# Altium PCB Sh_VL53L7CXV0GC.PcbDoc
Units mm, origin at the board's own origin, x right, y up, seen from the top; angles counter-clockwise.
Board outline 37.5 x 30 mm, 2 copper layers (Top Layer, Bottom Layer); 10 components, 8 nets, 40 pads, 0 vias.
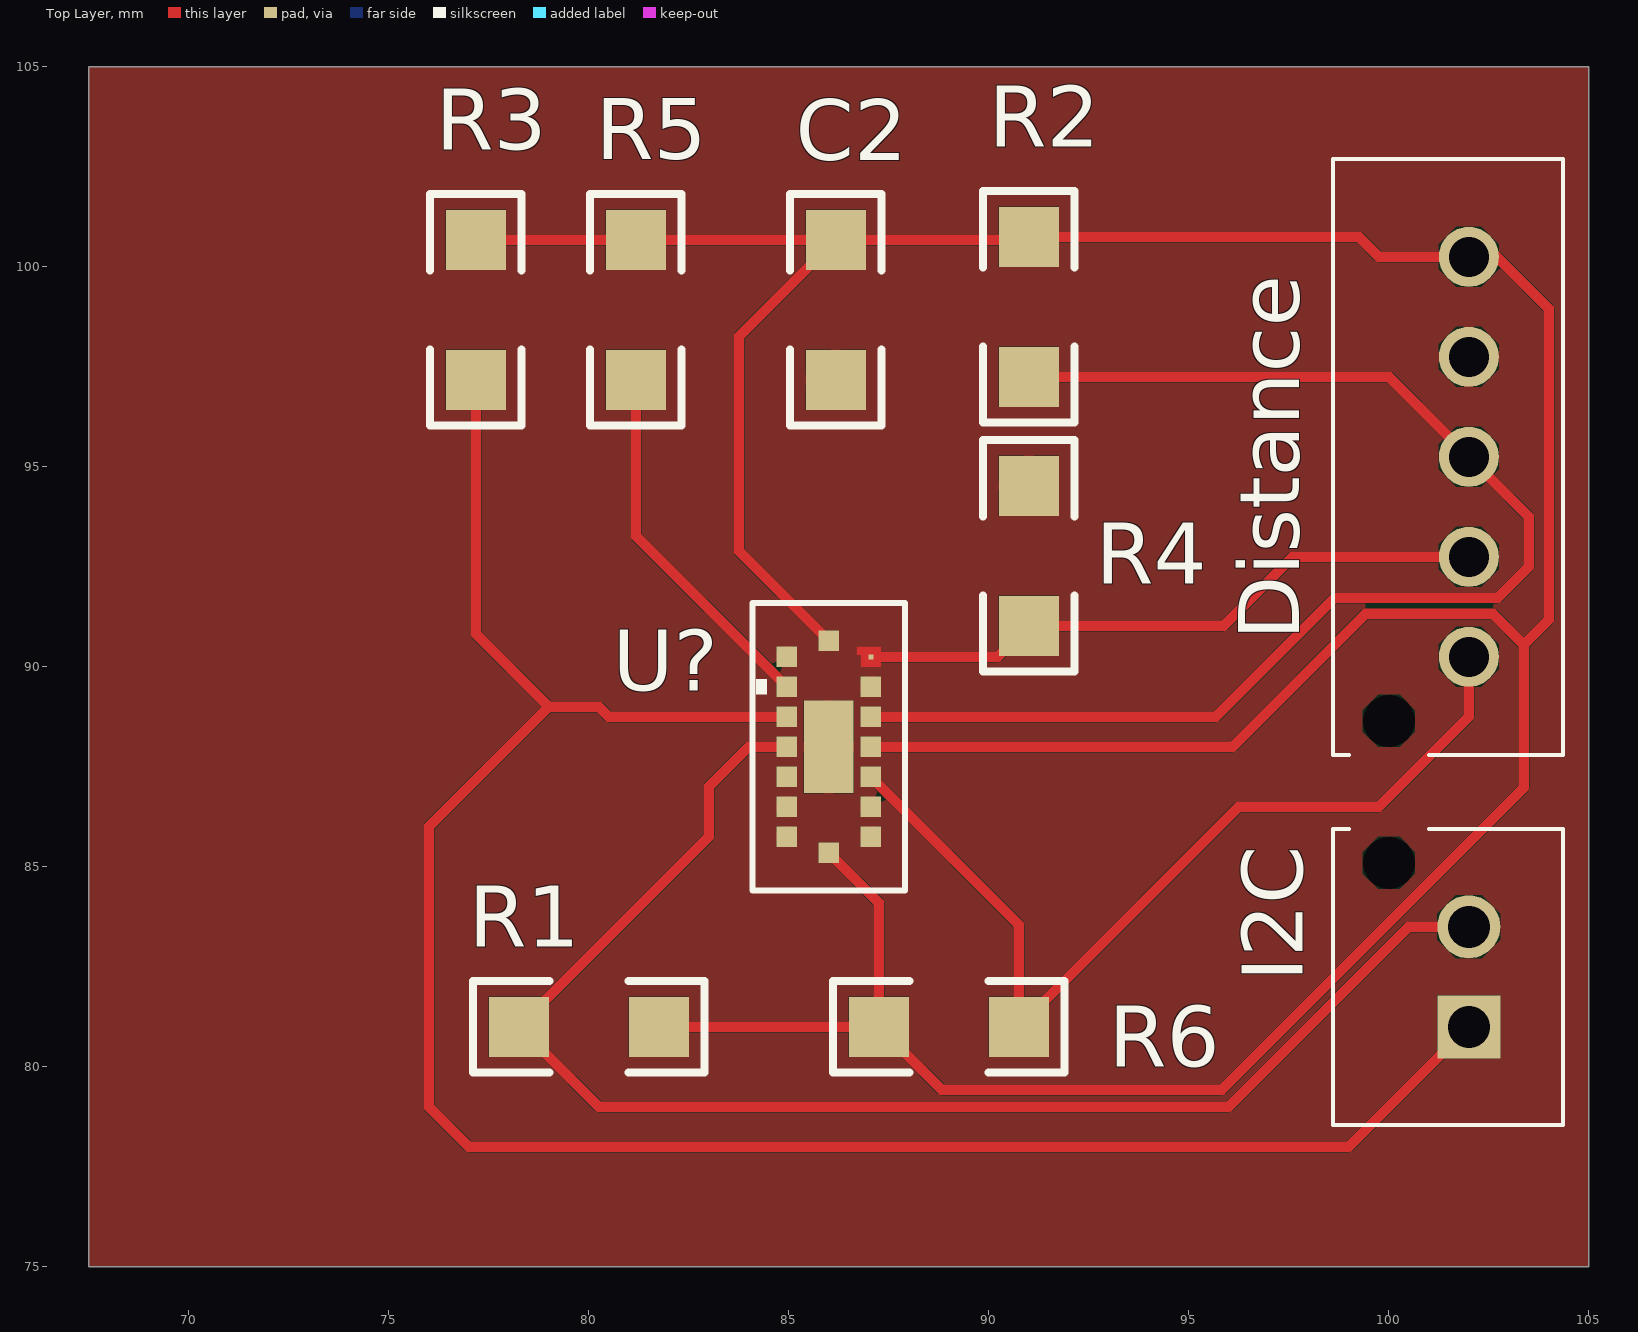
[diagram p0: Top Layer view]
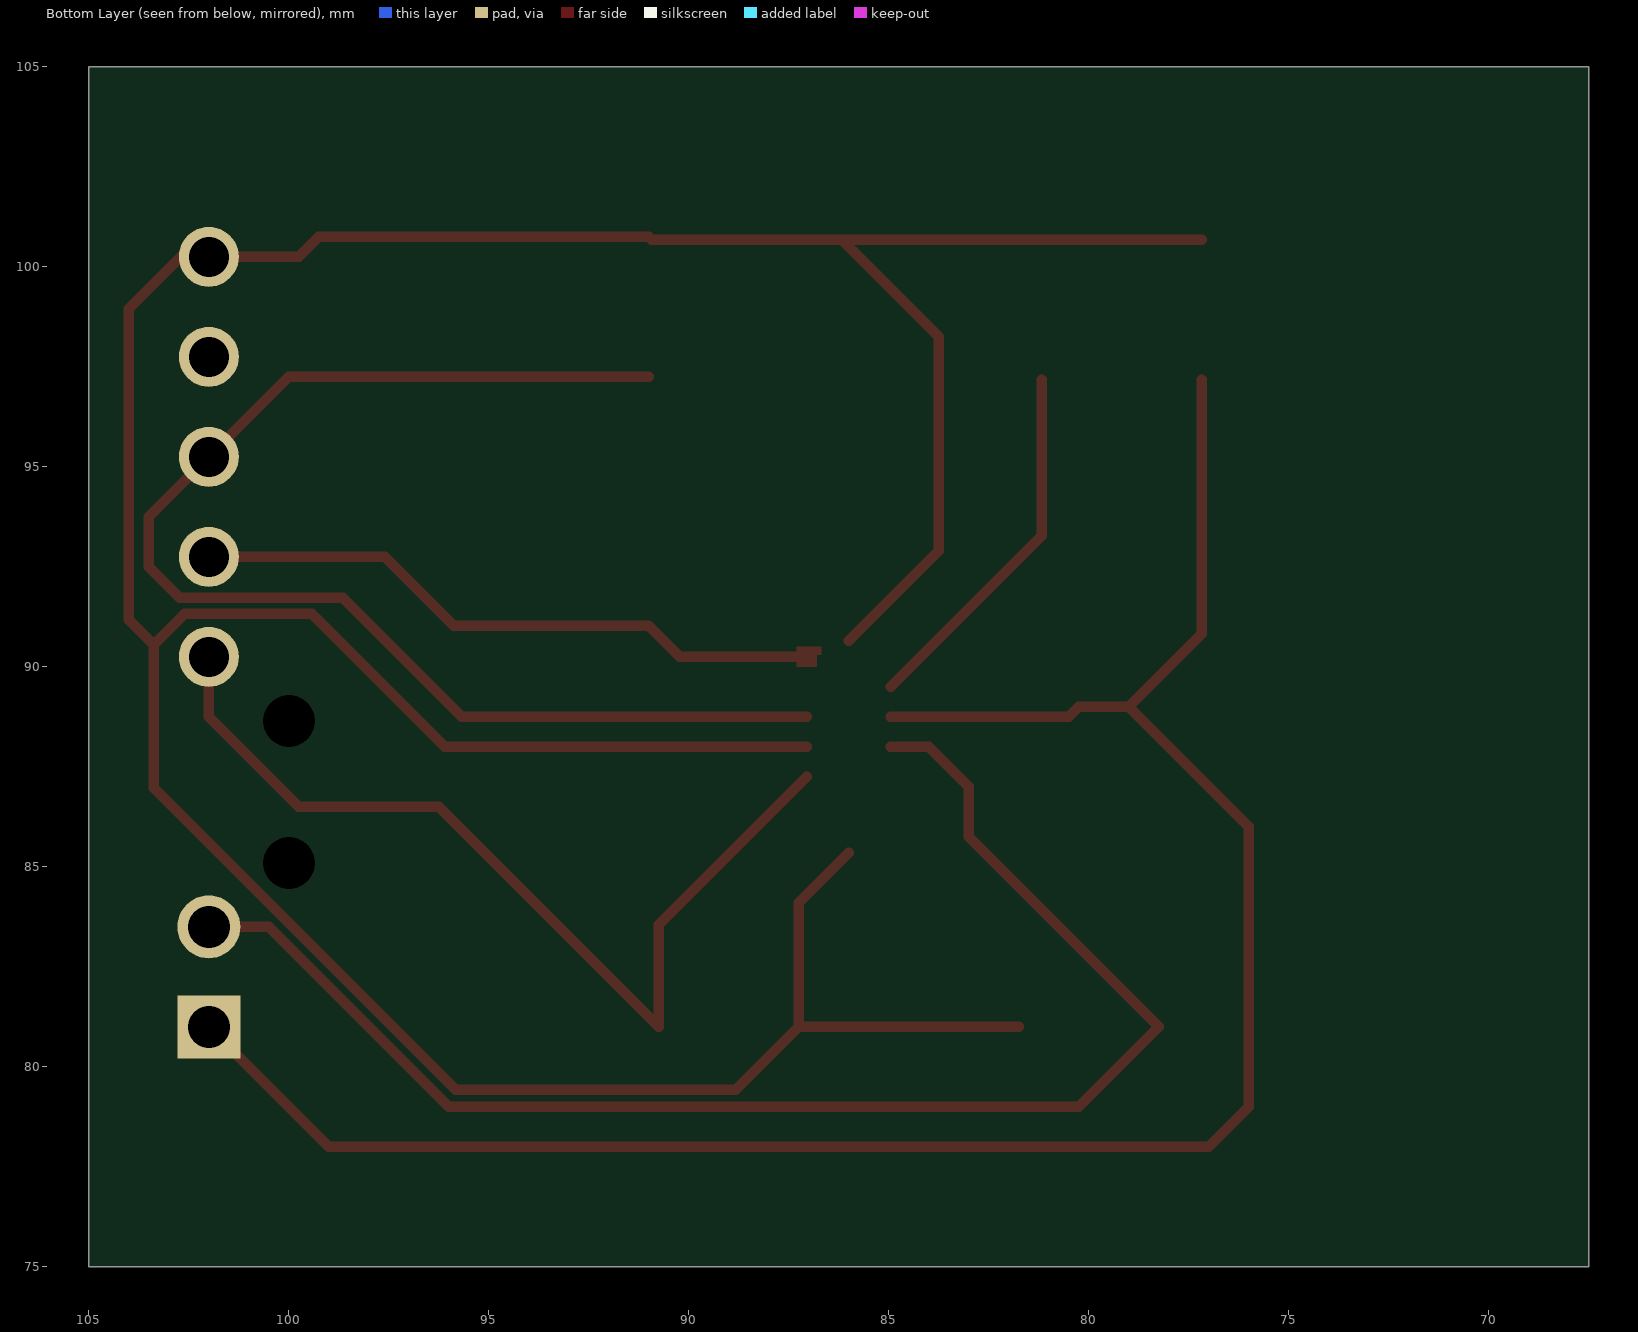
[diagram p1: Bottom Layer view, seen from below]
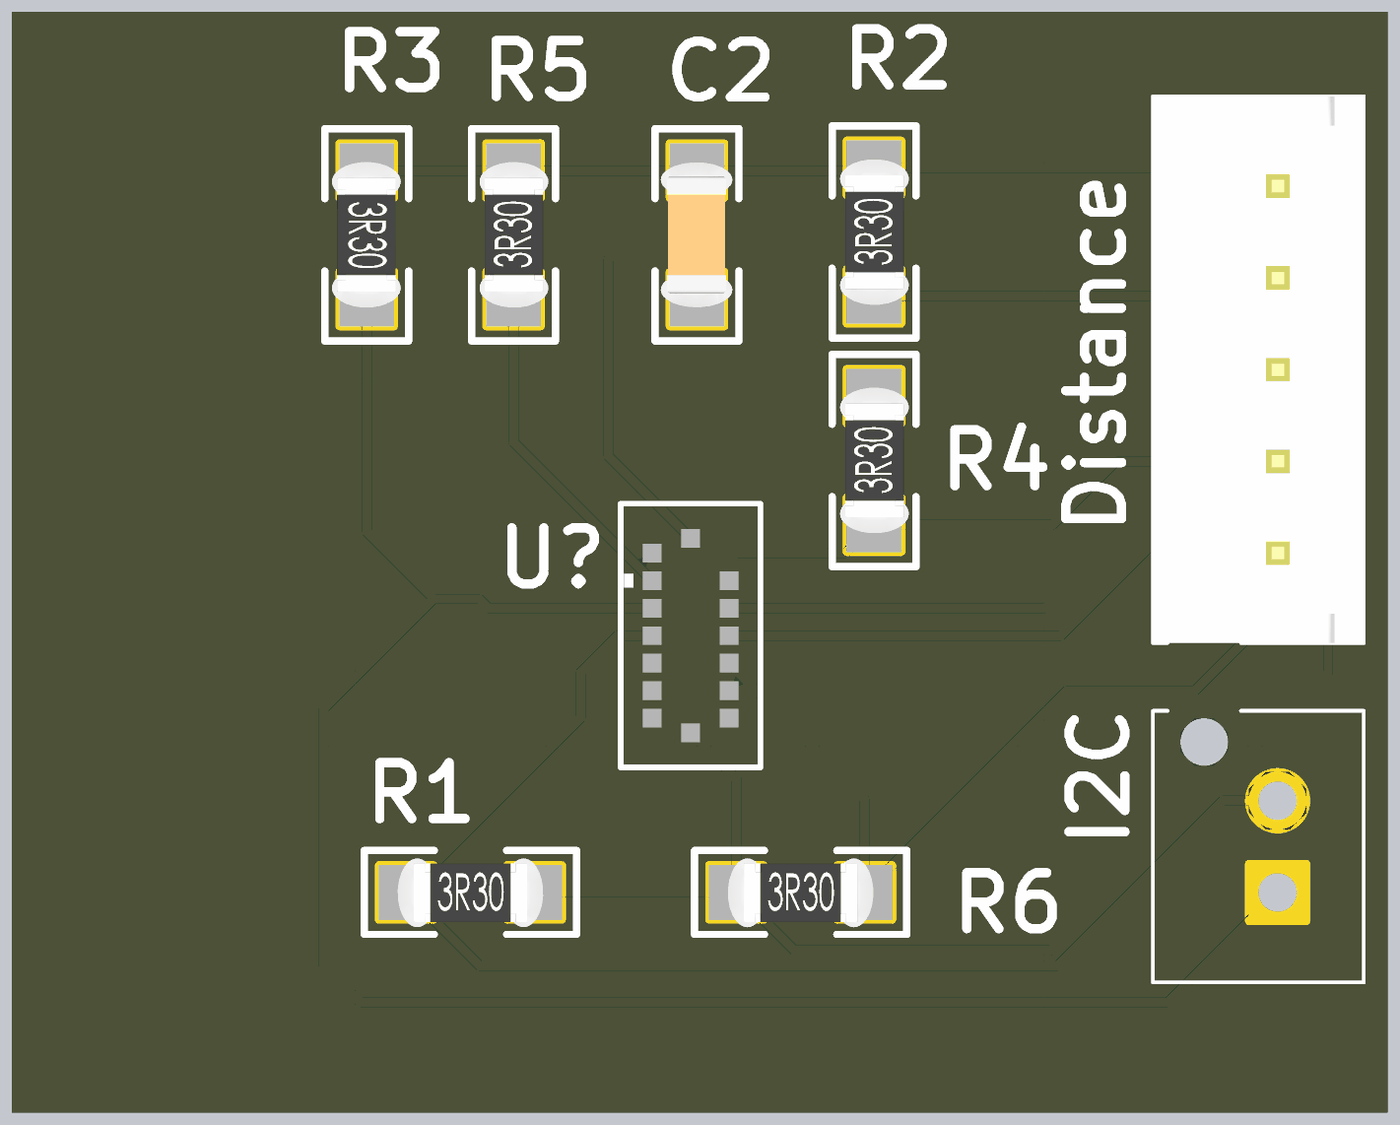
[diagram p2: 3D render of the assembled board from above, using the file's embedded part models]

## Layer stack, top to bottom
Top Solder: solder mask 0.0102, Solder Resist, Dk 3.5
Top Layer: signal copper 0.0356
Dielectric 1: dielectric 0.32, FR-4, Dk 4.8
Bottom Layer: signal copper 0.0356
Bottom Solder: solder mask 0.0102, Solder Resist, Dk 3.5

## Board outline
67.5,105 105,105 105,75 67.5,75

## Design rules (kind name [scope] priority, off if disabled: settings)
AssemblyTestPointUsage [All] p1 off:
AssemblyTestpoint [All] p1 off: testpointundercomponent=TRUE minsize=1.016 maxsize=2.54 preferedsize=1.524 minholesize=0 maxholesize=1.016 preferedholesize=0.813 testpointgrid=0.025 usegrid=TRUE gridtolerance=0 allowsidetop=TRUE allowsidebottom=TRUE
Clearance [All] p1 off: gap=0.254 ignorepadtopadclearanceinfootprint=FALSE
ComponentClearance [All] p1 off: gap=0.254 collisioncheckmode=3 verticalgap=0.254 showdistances=FALSE
DiffPairsRouting [All] p1 off: maxlimit=0.254 minlimit=0.254 mostfreqgap=0.254 toplayer_minwidth=0.381 toplayer_maxwidth=0.381 toplayer_prefwidth=0.381 bottomlayer_minwidth=0.381 bottomlayer_maxwidth=0.381 bottomlayer_prefwidth=0.381 maxuncoupledlength=12.7
FabricationTestPointUsage [All] p1 off: valid=0 allowmultiple=FALSE
FabricationTestpoint [All] p1 off: side=3 testpointundercomponent=TRUE minsize=1.016 maxsize=2.54 preferedsize=1.524 minholesize=0 maxholesize=1.016 preferedholesize=0.813 testpointgrid=0.025 allowsidetop=TRUE allowsidebottom=TRUE usegrid=TRUE gridtolerance=0
FanoutControl Fanout_BGA [IsBGA] p1 off: bgadir=Out bgaviamode=Centered fanoutstyle=Auto fanoutdirection=Alternating viagrid=0.025 // Fanout_BGA (Default Rule)
FanoutControl Fanout_LCC [IsLCC] p2 off: bgadir=Out bgaviamode=Centered fanoutstyle=Auto fanoutdirection=Alternating viagrid=0.025 // Fanout_LCC (Default Rule)
FanoutControl Fanout_SOIC [IsSOIC] p3 off: bgadir=Out bgaviamode=Centered fanoutstyle=Auto fanoutdirection=Alternating viagrid=0.025 // Fanout_SOIC (Default Rule)
FanoutControl Fanout_Small [(CompPinCount < 5)] p4 off: bgadir=Out bgaviamode=Centered fanoutstyle=Auto fanoutdirection=OutThenIn viagrid=0.025 // Fanout_Small (Default Rule)
FanoutControl Fanout_Default [All] p5 off: bgadir=Out bgaviamode=Centered fanoutstyle=Auto fanoutdirection=Alternating viagrid=0.025 // Fanout_Default (Default Rule)
Height [All] p1 off: minheight=0 maxheight=25.4 prefheight=12.7
HoleSize [All] p1 off: absolutevalues=TRUE maxlimit=2.54 minlimit=0.025 maxpercent=80.000 minpercent=20.000
HoleToHoleClearance [All] p1 off: gap=0.254 allowstackedmicrovias=TRUE
LayerPairs [All] p1 off: enforce=TRUE
MinimumSolderMaskSliver [All] p1 off: minsoldermaskwidth=0.254
NetAntennae [All] p1 off: netantennaetolerance=0
PasteMaskExpansion [All] p1 off: expansion=0
PlaneClearance [All] p1 off: clearance=0.508
PlaneConnect [All] p1 off: planeconnectstyle=Relief reliefexpansion=0.508 reliefentries=4 reliefconductorwidth=0.254 reliefairgap=0.254
PolygonConnect [All] p1 off: connectstyle=Relief reliefconductorwidth=0.254 reliefentries=4 polygonreliefangle="90 Angle" airgapwidth=0.254
RoutingCorners [All] p1 off: cornerstyle=45-Degree minsetback=2.54 maxsetback=2.54
RoutingLayers [All] p1 off: top layer_v5=TRUE bottom layer_v5=TRUE
RoutingPriority [All] p1 off: routingpriority=0
RoutingTopology [All] p1 off: topology=Shortest
RoutingVias [All] p1 off: holewidth=0.711 width=1.27 viastyle="Through Hole" minholewidth=0.711 minwidth=1.27 maxholewidth=0.711 maxwidth=1.27
ShortCircuit [All] p1 off: allowed=FALSE
SilkToSilkClearance [All] p1 off: silktosilkclearance=0.254
SilkToSolderMaskClearance [IsPad] p1 off: minsilkscreentomaskgap=0.254 clearancetoexposedcopper=TRUE
SolderMaskExpansion [All] p1 off: expansion=0.102 istentingtop=FALSE
UnRoutedNet [All] p1 off:
UnpouredPolygon [All] p1 off:
Width [All] p1 off: maxlimit=0.254 minlimit=0.254 preferedwidth=0.254
1 further rules are at their usual default settings.

## Components (designator, comment, footprint, x,y, rotation, side; value= is the part's Value field where it differs from the comment)
C2 "Cap" "Capacitor 1206" 86.175,98.925 r270 top
Distance "Header 5" B5BXHAMLFSN 102,90.25 r90 top
I2C "" B2BXHAMLFSN 102,81 r90 top
R1 "Res2" "Resistor 1206" 80,81 r0 top
R2 "Res2" "Resistor 1206" 91,99 r90 top
R3 "Res2" "Resistor 1206" 77.175,98.925 r270 top
R4 "Res2" "Resistor 1206" 91,92.775 r90 top
R5 "Res2" "Resistor 1206" 81.175,98.925 r90 top
R6 "Res2" "Resistor 1206" 89,81 r0 top
U? "VL53L7CXV0GC1" LGA16_OPTICAL-LINER_STM 86,88 r180 top

## Footprints (in the part's own frame and the unit in brackets; to place one, negate y for a bottom-side part, rotate by r counter-clockwise, add the part's x,y. Pads: shape width x height; smd on the part's side, far side on the other; paste and mask are expansions set on the pad)
B2BXHAMLFSN [mm]
  rect 1.575x1.575 hole 1.05: 1(0,0)
  round 1.575 hole 1.05: 2(2.5,0)
  round 0.65 hole 1.3 unplated: MH1(4.1,2)
  silkscreen extent -2.45,-2.35 4.95,3.4
B5BXHAMLFSN [mm]
  round 1.5 hole 1: 1(0,0) 2(2.5,0) 3(5,0) 4(7.5,0) 5(10,0)
  round 0.65 hole 1.3 unplated: MH1(-1.6,2)
  silkscreen extent -2.45,-2.35 12.45,3.4, body extent -2.45,-2.36 12.45,3.39, height 6.92
"Capacitor 1206" [mm]
  rect 1.5x1.5 smd: 1(-1.75,0) 2(1.75,0)
  silkscreen extent -2.89,-1.14 2.89,1.14, body extent -1.98,-0.99 1.98,0.96, height 1.3
LGA16_OPTICAL-LINER_STM [mil]
  rect 5x5 smd paste-2.5 mask-2.5: A1(-41.34,-88.58)
  rect 20x20 smd paste+0 mask+0: A2(-41.34,-59.06) A3(-41.34,-29.53) A4(-41.34,0) A5(-41.34,29.53) A6(-41.34,59.06) A7(-41.34,88.58) B1(0,-104.33) B7(0,104.33) C1(41.34,-88.58) C2(41.34,-59.06) C3(41.34,-29.53) C4(41.34,0) C5(41.34,29.53) C6(41.34,59.06) C7(41.34,88.58)
  rect 49x91 smd paste-45.5 mask-45.5: B4(0,0)
  Top Layer region: -31.34,-78.58 -51.34,-78.58 -51.34,-98.58 -27.34,-98.58 -27.34,-90.58 -31.34,-90.58
  silkscreen extent -75,-142 75,142
"Resistor 1206" [mm]
  rect 1.5x1.5 smd: 1(-1.75,0) 2(1.75,0)
  silkscreen extent -2.89,-1.14 2.89,1.14, body extent -1.98,-0.95 1.98,0.93, height 0.55

## Part data
C2: "Capacitor"
Distance: "Header, 5-Pin"
I2C: library part "Header 2H", "Header, 2-Pin, Right Angle"
R1 R2 R3 R4 R5 R6: "Resistor"
U?: "No Description Available"

## Nets (pads, with @x,y where several pads share a name; then routed paths per layer and width w, separated by ;. In a path a pad name is that pad's centre, name@x,y a point inside that pad or via, vN(x,y) a via of type N, cw(c..) or ccw(c..) an arc to the next point about the centre after c; other vN are vias at no path point)
GND: C2.2 Distance.4 R4.2 U?.A2 U?.A6 U?.A7 U?.B4 U?.C1 U?.C6 U?.C7
I2C_INT: Distance.3 R2.1 U?.A3 | length 33.2
  Top Layer w0.254: U?.A3 95.675,88.75 98.65,91.725 102.725,91.725 103.5,92.5 103.5,93.75 Distance.3 100,97.25 R2.1
I2C_LPN: Distance.1 R6.2 U?.A5 | length 23.7
  Top Layer w0.254: U?.A5 90.75,83.55 R6.2 96.25,86.5 99.75,86.5 102,88.75 Distance.1
I2C_RST: Distance.2 R4.1 U?.A1 | length 16
  Top Layer w0.254: U?.A1 90.225,90.25 R4.1 95.875,91.025 97.6,92.75 Distance.2
I2C_SCL: I2C.2 R1.1 U?.C4 | length 36.8
  Top Layer w0.254: U?.C4 84,88 83,87 83,85.75 R1.1 80.25,79 96,79 100.5,83.5 I2C.2
I2C_SDA: I2C.1 R3.2 U?.C3 | length 53.9
  Top Layer w0.254: R3.2 77.175,90.825 79,89 ; U?.C3 80.5,88.75 80.25,89 79,89 ; I2C.1 99,78 77,78 76,79 76,86 79,89
IOVDD: C2.1 Distance.5 R1.2 R2.2 R3.1 R5.2 R6.1 U?.A4 U?.B1 U?.B7 | length 100
  Top Layer w0.254: R3.1 R5.2 C2.1 ; R1.2 R6.1 ; U?.B7 87.25,84.1 R6.1 ; U?.B1 83.75,92.9 83.75,98.25 C2.1 ; U?.A4 96.1,88 99.425,91.325 102.6,91.325 103.375,90.55 ; R2.2@90.925,100.675 C2.1 ; R2.2 99.25,100.75 99.75,100.25 Distance.5 102.7,100.25 104,98.95 104,91.175 103.375,90.55 ; R6.1 88.825,79.425 95.825,79.425 103.375,86.975 103.375,90.55
NetR5_1: R5.1 U?.C2 | length 9.2
  Top Layer w0.254: R5.1 81.175,93.275 U?.C2
pads on no net: Distance.MH1 I2C.MH1 U?.C5

## Polygon pours and split planes (outlines as drawn)
GND on Top Layer "GND_L01_P001" (solid, pour order 1): 105,105 67.5,105 67.5,75 105,75